# Altium PCB bottom_simp1.PcbDoc
Units mil, origin at the board's own origin, x right, y up, seen from the top; angles counter-clockwise.
Board outline 6000 x 4000 mil, 2 copper layers (Top Layer, Bottom Layer); 63 components, 63 nets, 241 pads, 16 vias.
Unrouted connection lines stored in the file: 163.
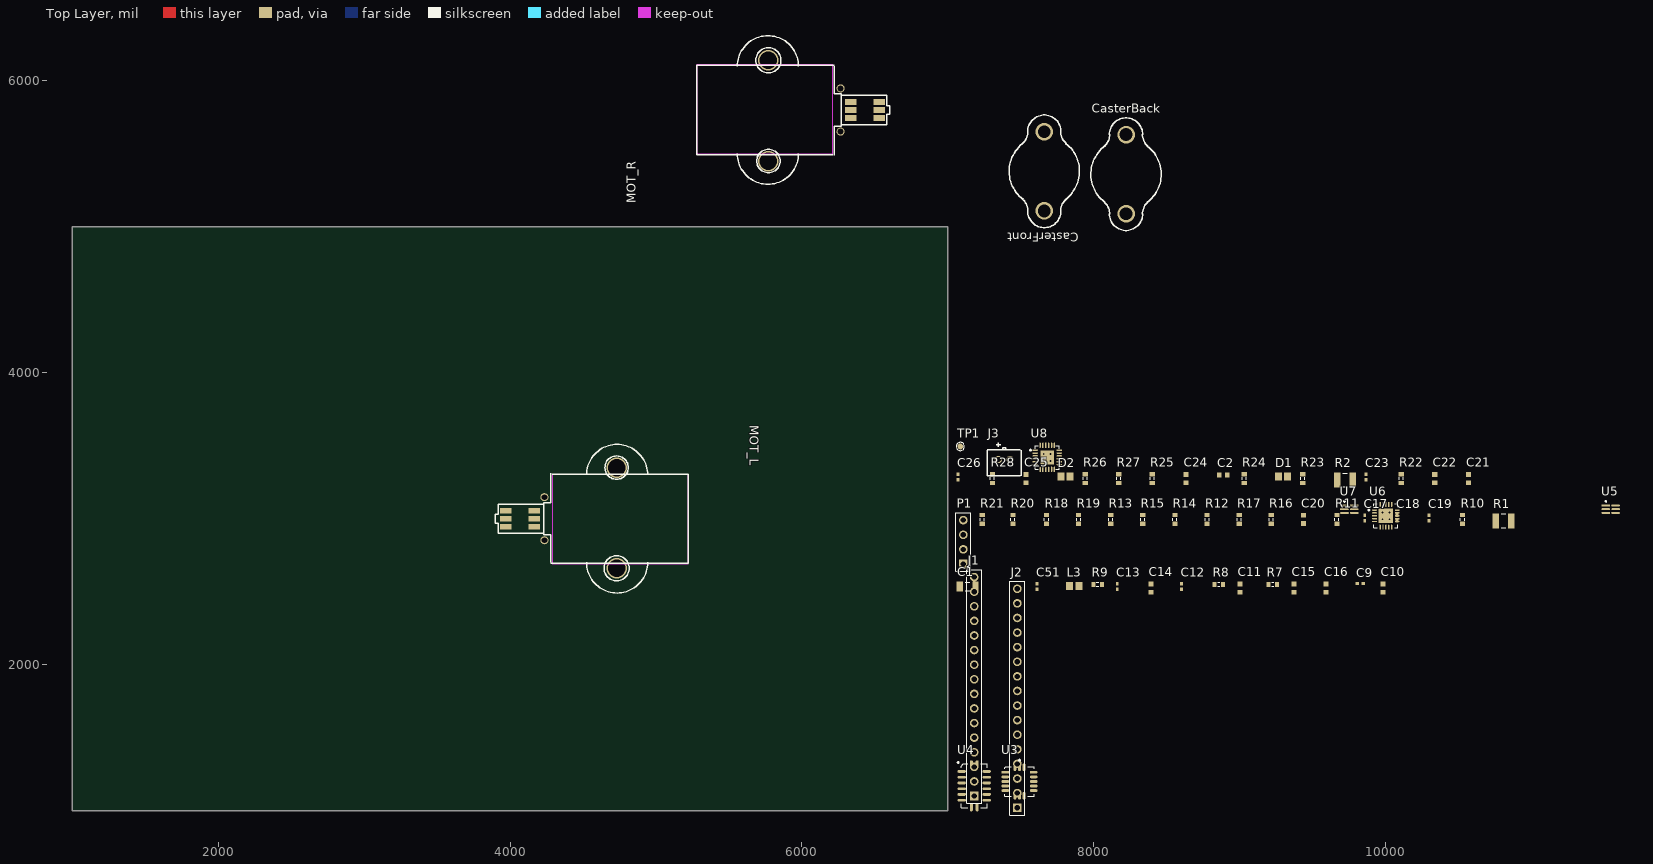
[diagram p0: Top Layer view]
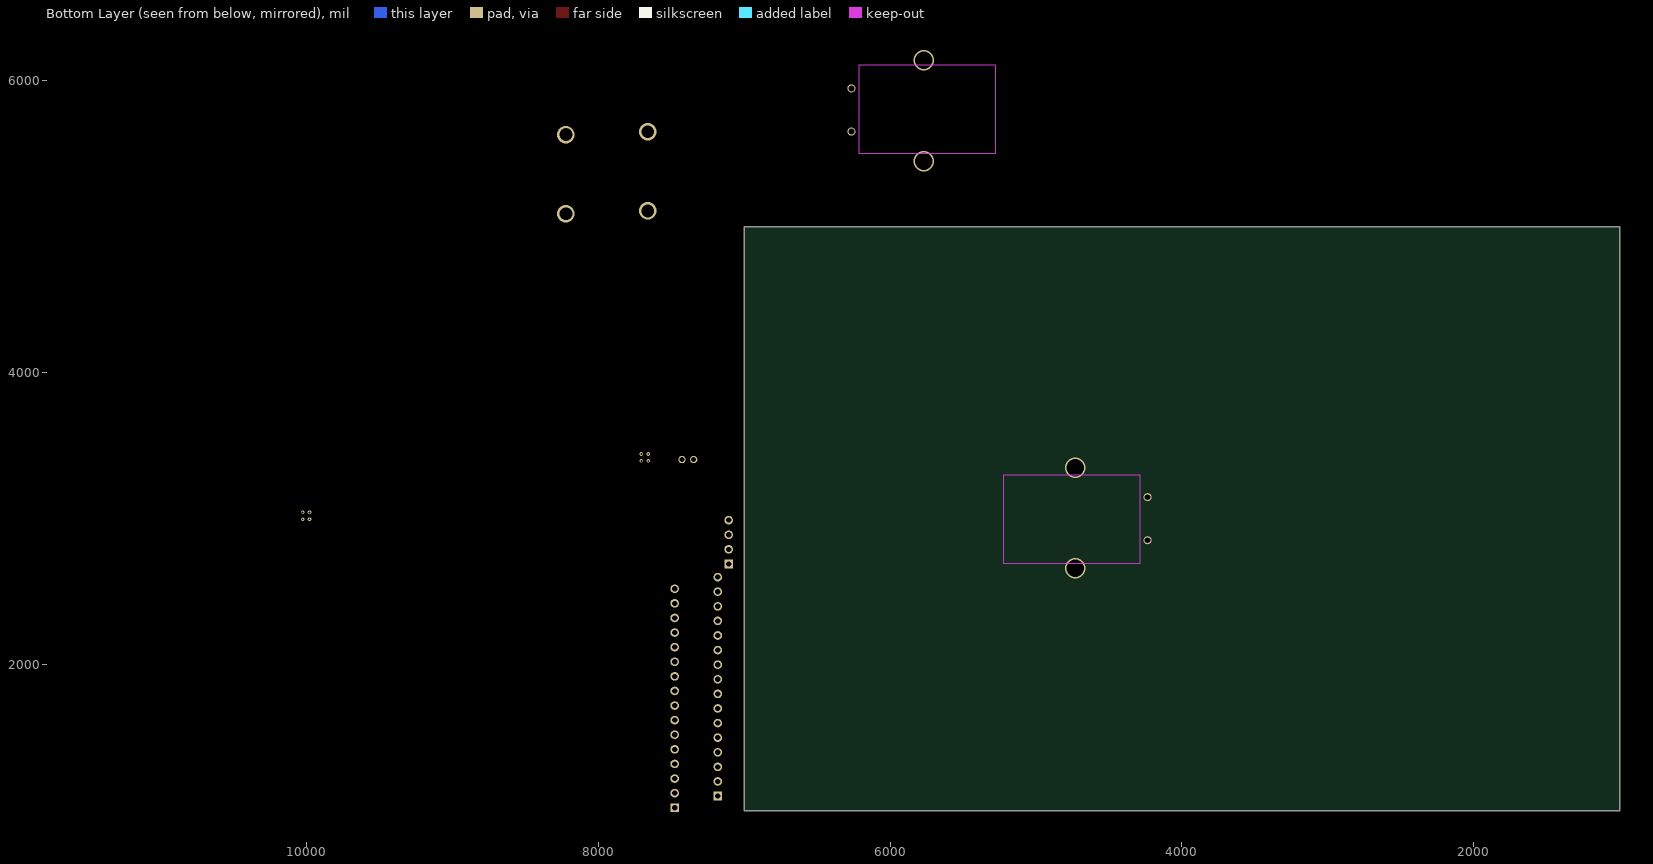
[diagram p1: Bottom Layer view, seen from below]

## Layer stack, top to bottom
Top Layer: signal copper 1.4
Dielectric: dielectric 12.6, FR-4, Dk 4.8
Bottom Layer: signal copper 1.4

## Board outline
1000,1000 7000,1000 7000,5000 1000,5000

## Design rules (kind name [scope] priority, off if disabled: settings)
Clearance [All] p1: gap=10
PolygonConnect [All] p1: connectstyle=Relief reliefconductorwidth=10 reliefentries=4 polygonreliefangle="90 Angle"
RoomDefinition bottom_simp_power [InComponentClass('bottom_simp_power')] p1: confinementstyle=ConfineIn formatcopy=TRUE lockcomponents=FALSE outline 7045,3280 7795,3280 7795,3635 7045,3635
RoomDefinition bottom_simp_motor [InComponentClass('bottom_simp_motor')] p2: confinementstyle=ConfineIn formatcopy=TRUE lockcomponents=FALSE outline 7045,1405 11620,1405 11620,3235 7045,3235
RoomDefinition bottom_simp_gyro [InComponentClass('bottom_simp_gyro')] p3: confinementstyle=ConfineIn formatcopy=TRUE lockcomponents=FALSE outline 7045,975 7635,975 7635,1465 7045,1465
RoutingVias [All] p1: holewidth=28 width=50 viastyle="Through Hole" minholewidth=28 minwidth=50 maxholewidth=28 maxwidth=50
SilkscreenOverComponentPads [All] p1: minsilkscreentomaskgap=10
SolderMaskExpansion [All] p1: expansion=4
Width "Schematic Width Constraint_14" [InNet('3.3V')] p1: maxlimit=100 minlimit=10 preferedwidth=25 minimp=50.000000 maximp=50.000000 favimp=50.000000
Width "Schematic Width Constraint_13" [InNet('VBAT_SW')] p2: maxlimit=50 minlimit=10 preferedwidth=25 minimp=50.000000 maximp=50.000000 favimp=50.000000
Width "Schematic Width Constraint_12" [InNet('VBAT +300')] p3: maxlimit=25 minlimit=10 preferedwidth=25 minimp=50.000000 maximp=50.000000 favimp=50.000000
Width "Schematic Width Constraint_11" [InNet('NetJ3_1')] p4: maxlimit=25 minlimit=10 preferedwidth=25 minimp=50.000000 maximp=50.000000 favimp=50.000000
Width "Schematic Width Constraint_10" [InNet('NetL2_1')] p5: maxlimit=25 minlimit=10 preferedwidth=25 minimp=50.000000 maximp=50.000000 favimp=50.000000
Width "Schematic Width Constraint_9" [InNet('NetL2_2')] p6: maxlimit=25 minlimit=10 preferedwidth=25 minimp=50.000000 maximp=50.000000 favimp=50.000000
Width "Schematic Width Constraint_8" [InNet('GND')] p7: maxlimit=25 minlimit=10 preferedwidth=25 minimp=50.000000 maximp=50.000000 favimp=50.000000
Width "Schematic Width Constraint_7" [InNet('VBAT')] p8: maxlimit=25 minlimit=10 preferedwidth=25 minimp=50.000000 maximp=50.000000 favimp=50.000000
Width "Schematic Width Constraint_6" [InNet('5VUSB_SW')] p9: maxlimit=25 minlimit=10 preferedwidth=25 minimp=50.000000 maximp=50.000000 favimp=50.000000
Width "Schematic Width Constraint_5" [InNet('VBAT_MOT_SW')] p10: maxlimit=25 minlimit=10 preferedwidth=20 minimp=50.000000 maximp=50.000000 favimp=50.000000
Width "Schematic Width Constraint_4" [InNet('MOT_0B')] p11: maxlimit=25 minlimit=10 preferedwidth=20 minimp=50.000000 maximp=50.000000 favimp=50.000000
Width "Schematic Width Constraint_3" [InNet('MOT_0A')] p12: maxlimit=25 minlimit=10 preferedwidth=20 minimp=50.000000 maximp=50.000000 favimp=50.000000
Width "Schematic Width Constraint_2" [InNet('MOT1_B')] p13: maxlimit=25 minlimit=10 preferedwidth=20 minimp=50.000000 maximp=50.000000 favimp=50.000000
Width "Schematic Width Constraint_1" [InNet('MOT1_A')] p14: maxlimit=25 minlimit=10 preferedwidth=20 minimp=50.000000 maximp=50.000000 favimp=50.000000
Width "Schematic Width Constraint" [InNet('9V_OUT')] p15: maxlimit=25 minlimit=10 preferedwidth=20 minimp=50.000000 maximp=50.000000 favimp=50.000000
Width [All] p16: maxlimit=10 minlimit=10 preferedwidth=10
27 further rules are at their usual default settings.

## Classes and differential pairs
component class bottom_simp_gyro: C1 C9 C10 C11 C12 C13 C14 C15 C16 C51 J1 J2 L3 R7 R8 R9 U3 U4
component class bottom_simp_motor: C17 C18 C19 C20 CasterBack CasterFront MOT_L MOT_R P1 R1 R10 R11 R12 R13 R14 R15 R16 R17 R18 R19 R20 R21 U5 U6 U7
component class bottom_simp_power: C2 C21 C22 C23 C24 C25 C26 D1 D2 J3 L1 L2 R2 R22 R23 R24 R25 R26 R27 R28 TP1 U8

## Components (designator, comment, footprint, x,y, rotation, side; value= is the part's Value field where it differs from the comment)
C1 "Cap Semi" CAPC3216L 7135,2535 r0 top
C2 "Cap" CAPC1608L 8885,3300 r0 top
C9 "Cap Semi" CAPC1005L 9825,2555 r0 top
C10 "Cap Semi" CAPC1608L 9980,2525 r90 top
C11 "Cap Semi" CAPC1608L 9000,2525 r90 top
C12 "Cap Semi" CAPC1005L 8600,2535 r90 top
C13 "Cap Semi" CAPC1005L 8160,2535 r90 top
C14 "Cap Semi" CAPC1608L 8390,2525 r90 top
C15 "Cap Semi" CAPC1608L 9370,2525 r90 top
C16 "Cap Semi" CAPC1608L 9590,2525 r90 top
C17 "Cap Semi" CAPC1005L 9855,3005 r90 top
C18 "Cap Semi" CAPC1005L 10075,3005 r90 top
C19 "Cap Semi" CAPC1005L 10295,3005 r90 top
C20 "Cap Semi" CAPC1608L 9435,2995 r90 top
C21 "Cap" CAPC1608L 10565,3275 r90 top
C22 "Cap" CAPC1608L 10335,3275 r90 top
C23 "Cap" CAPC1005L 9865,3285 r90 top
C24 "Cap" CAPC1608L 8630,3275 r90 top
C25 "Cap" CAPC1608L 7535,3275 r90 top
C26 "Cap" CAPC1005L 7070,3285 r90 top
C51 "Cap Semi" CAPC1005L 7610,2535 r90 top
CasterBack "non connect" "3/8\"Caster" 8220,5360 r90 top
CasterFront "non connect" "3/8\"Caster" 7660,5380 r270 top
D1 "Charge" INDC2012L 9295,3290 r0 top
D2 "Power" INDC2012L 7805,3290 r0 top
J1 "Header 16" HDR1X16 7180,1100 r90 top
J2 "Header 16" HDR1X16 7475,1020 r90 top
J3 "Bat" BatteryConnJST 7385,3405 r0 top
L3 "Inductor" INDC2012L 7865,2540 r0 top
MOT_L "motorEncoder" motorEncoder 3960,3000 r0 top
MOT_R "motorEncoder" motorEncoder 6540,5800 r180 top
P1 "Header 4" HDR1X4 7105,2690 r90 top
R1 "Res3" RESC3225L 10805,2985 r0 top
R2 "Res3" RESC3225L 9720,3265 r0 top
R7 "Res3" RESC1608L 9225,2550 r0 top
R8 "Res3" RESC1608L 8855,2550 r0 top
R9 "Res3" RESC1608L 8025,2550 r0 top
R10 "" RESC1608L 10525,2995 r90 top
R11 "" RESC1608L 9665,2995 r90 top
R12 "Res3" RESC1608L 8775,2995 r90 top
R13 "Res3" RESC1608L 8115,2995 r90 top
R14 "Res3" RESC1608L 8555,2995 r90 top
R15 "Res3" RESC1608L 8335,2995 r90 top
R16 "" RESC1608L 9215,2995 r90 top
R17 "" RESC1608L 8995,2995 r90 top
R18 "Res3" RESC1608L 7675,2995 r90 top
R19 "Res3" RESC1608L 7895,2995 r90 top
R20 "" RESC1608L 7445,2995 r90 top
R21 "" RESC1608L 7235,2995 r90 top
R22 "Res3" RESC1608L 10105,3275 r90 top
R23 "Res3" RESC1608L 9430,3275 r90 top
R24 "Res3" RESC1608L 9030,3275 r90 top
R25 "Res3" RESC1608L 8400,3275 r90 top
R26 "Res3" RESC1608L 7940,3275 r90 top
R27 "Res3" RESC1608L 8170,3275 r90 top
R28 "Res3" RESC1608L 7305,3275 r90 top
TP1 "TestPoint" TestPoint 7085,3495 r0 top
U3 "LPY510AL" LGA16 7490,1200 r0 top
U4 "LIS3LV02DL" "LGA16 (4.4x7.5x1 mm)" 7180,1170 r90 top
U5 "schmit trigger" DCK(R-PDSO-C6) 11540,3065 r0 top
U6 "MOTOR-A3906" QFN-20 10000,3020 r0 top
U7 "schmit trigger" DCK(R-PDSO-C6) 9750,3065 r0 top
U8 "LTC3566" QFN-24 7680,3420 r0 top

## Footprints (in the part's own frame and the unit in brackets; to place one, negate y for a bottom-side part, rotate by r counter-clockwise, add the part's x,y. Pads: shape width x height; smd on the part's side, far side on the other; paste and mask are expansions set on the pad)
"3/8\"Caster" [mil] "3/8\" caster for board"
  silkscreen extent -386,-241 386,241
BatteryConnJST [mil] "Connector for Battery"
  round 50 hole 35: 1(-40,0) 2(40,0)
  silkscreen extent -117,-110 116,115
CAPC1005L [mm] "Chip Capacitor, Body 1.0x0.5mm, IPC High Density"
  rect 0.6x0.5 smd: 1(-0.5,0) 2(0.5,0)
  body extent -0.55,-0.3 0.55,0.3, height 1.3
CAPC1608L [mm] "Chip Capacitor, Body 1.6x0.8mm, IPC High Density"
  rect 0.8x0.9 smd: 1(-0.7,0) 2(0.7,0)
  body extent -0.87,-0.48 0.87,0.48, height 1.3
CAPC3216L [mm] "Chip Capacitor, Body 3.2x1.6mm, IPC High Density"
  rect 1.1x1.7 smd: 1(-1.35,0) 2(1.35,0)
  silkscreen extent -0.4,-0.75 0.4,0.75, body extent -1.7,-0.9 1.7,0.9, height 1.3
DCK(R-PDSO-C6) [mm] "TSOP, 6-Leads, Body 2.2x1.4mm (max), Pitch 0.65mm, IPC Medium Density"
  oval 1.5x0.35 smd: 1(-0.85,0.65) 2(-0.85,0) 3(-0.85,-0.65) 4(0.85,-0.65) 5(0.85,0) 6(0.85,0.65)
  silkscreen extent -0.97,1.25 -0.72,1.5, body extent -0.7,-1.07 0.7,1.08, height 1.1
HDR1X4 [mm] "Connector; Header; 4 Position"
  rect 1.5x1.5 hole 0.9: 1(0,0)
  round 1.5 hole 0.9: 2(2.54,0) 3(5.08,0) 4(7.62,0)
  silkscreen extent -1.27,-1.27 8.89,1.27
HDR1X16 [mm] "Connector; Header; 16 Position"
  rect 1.5x1.5 hole 0.9: 1(0,0)
  round 1.5 hole 0.9: 2(2.54,0) 3(5.08,0) 4(7.62,0) 5(10.16,0) 6(12.7,0) 7(15.24,0) 8(17.78,0) 9(20.32,0) 10(22.86,0) 11(25.4,0) 12(27.94,0) 13(30.48,0) 14(33.02,0) 15(35.56,0) 16(38.1,0)
  silkscreen extent -1.27,-1.27 39.37,1.27
INDC2012L [mm] "Chip Inductor, Body 2.0x1.2mm, IPC High Density"
  rect 1.2x1.4 smd: 1(-0.8,0) 2(0.8,0)
  body extent -1.1,-0.7 1.1,0.7, height 0.55
LGA16 [mm] "LCC, 16-Pins, Body 5.2x5.2mm (max), Pitch 0.80mm, IPC Medium Density"
  oval 1.35x0.5 smd: 1(-2.475,1.6) 2(-2.475,0.8) 3(-2.475,0) 4(-2.475,-0.8) 5(-2.475,-1.6) 9(2.475,-1.6) 10(2.475,-0.8) 11(2.475,0) 12(2.475,0.8) 13(2.475,1.6)
  oval 0.5x1.35 smd: 6(-0.8,-2.475) 7(0,-2.475) 8(0.8,-2.475) 14(0.8,2.475) 15(0,2.475) 16(-0.8,2.475)
  silkscreen extent -2.6,-2.6 2.6,3.82, body extent -2.5,-2.5 2.5,2.5, height 1.6
"LGA16 (4.4x7.5x1 mm)" [mm] "LCC, 16-Pins, Body 7.7x4.6mm (max), Pitch 1.00mm, IPC Medium Density"
  oval 0.5x1.45 smd: 1(2.5,2.175) 2(1.5,2.175) 3(0.5,2.175) 4(-0.5,2.175) 5(-1.5,2.175) 6(-2.5,2.175) 9(-2.5,-2.175) 10(-1.5,-2.175) 11(-0.5,-2.175) 12(0.5,-2.175) 13(1.5,-2.175) 14(2.5,-2.175)
  oval 1.45x0.5 smd: 7(-3.725,0.5) 8(-3.725,-0.5) 15(3.725,-0.5) 16(3.725,0.5)
  silkscreen extent -3.85,-2.3 4.19,2.92, body extent -3.75,-2.2 3.75,2.2, height 1
motorEncoder [mm] "Precision Wire Wound Inductor, 2-Leads, Body 2.5x2.3mm, IPC Medium Density"
  rect 2x1 smd: A(0.25,1.4) C(5.25,1.4) E1(5.25,0) E2(5.25,-1.4) K(0.25,-1.4) NC(0.25,0)
  round 1.4 hole 1: M1(7,3.75) M2(7,-3.75)
  Keep-Out Layer region: 8.382,-7.874 32.004,-7.874 32.004,7.62 8.382,7.62
  silkscreen extent -1.52,-12.93 32,12.93
QFN-20 [mm] "QFN, 20-Leads, Body 4.2x4.2mm (max), Pitch 0.50mm, IPC Medium Density"
  oval 0.85x0.25 smd: 1(-1.975,1) 2(-1.975,0.5) 3(-1.975,0) 4(-1.975,-0.5) 5(-1.975,-1) 11(1.975,-1) 12(1.975,-0.5) 13(1.975,0) 14(1.975,0.5) 15(1.975,1)
  oval 0.25x0.85 smd: 6(-1,-1.975) 7(-0.5,-1.975) 8(0,-1.975) 9(0.5,-1.975) 10(1,-1.975) 16(1,1.975) 17(0.5,1.975) 18(0,1.975) 19(-0.5,1.975) 20(-1,1.975)
  rect 2.5x2.5 smd: 21(0,0)
  silkscreen extent -3.07,-2.1 2.1,2.1, body extent -2.07,-2.07 2.07,2.07, height 0.8
QFN-24 [mm] "QFN, 24-Leads, Body 4.1x4.1mm (max), Pitch 0.50mm, IPC Medium Density"
  oval 0.95x0.25 smd: 1(-2.1,1.25) 2(-2.1,0.75) 3(-2.1,0.25) 4(-2.1,-0.25) 5(-2.1,-0.75) 6(-2.1,-1.25) 13(2.1,-1.25) 14(2.1,-0.75) 15(2.1,-0.25) 16(2.1,0.25) 17(2.1,0.75) 18(2.1,1.25)
  oval 0.25x0.95 smd: 7(-1.25,-2.1) 8(-0.75,-2.1) 9(-0.25,-2.1) 10(0.25,-2.1) 11(0.75,-2.1) 12(1.25,-2.1) 19(1.25,2.1) 20(0.75,2.1) 21(0.25,2.1) 22(-0.25,2.1) 23(-0.75,2.1) 24(-1.25,2.1)
  rect 2.4x2.4 smd: 25(0,0)
  silkscreen extent -3.02,-2.05 2.05,2.05, body extent -2.05,-2.05 2.05,2.05, height 0.8
RESC1608L [mm] "Chip Resistor, Body 1.6x0.8mm, IPC High Density"
  rect 0.7x0.9 smd: 1(-0.75,0) 2(0.75,0)
  silkscreen extent -0.2,-0.35 0.2,0.35, body extent -0.85,-0.48 0.85,0.48, height 0.9
RESC3225L [mm] "Chip Resistor, Body 3.2x2.5mm, IPC High Density"
  rect 1.1x2.6 smd: 1(-1.35,0) 2(1.35,0)
  silkscreen extent -0.4,-1.2 0.4,1.2, body extent -1.68,-1.32 1.68,1.32, height 0.9
TestPoint [mil]
  round 40 smd: 1(0,0)
  silkscreen extent -28,-28 28,28

## Part data
C1 C9 C10 C11 C12 C13 C14 C15 C16 C17 C18 C19 C20 C51: "Capacitor (Semiconductor SIM Model)"
C2 C21 C22 C23 C24 C25 C26: "Capacitor"
CasterBack CasterFront: library part Caster, "This is just a space saver to get the caster onto the pcb"
D1 D2: library part LED2, "Typical RED, GREEN, YELLOW, AMBER GaAs LED"
J1 J2: "Header, 16-Pin"
J3: library part BatteryConnJST
P1: "Header, 4-Pin"
R1 R2 R7 R8 R9 R12 R13 R14 R15 R18 R19 R22 R23 R24 R25 R26 R27 R28: "Resistor"
R10 R11 R16 R17 R20 R21: library part Res3, "Resistor"

## Via types
v1: diameter 25.98, hole 12.99, Top Layer to Bottom Layer, tented top, 8 vias
v2: diameter 120, hole 86.61, Top Layer to Bottom Layer, 4 vias
v3: diameter 140, hole 120, Top Layer to Bottom Layer, 4 vias

## Nets (pads, with @x,y where several pads share a name; then routed paths per layer and width w, separated by ;. In a path a pad name is that pad's centre, name@x,y a point inside that pad or via, vN(x,y) a via of type N, cw(c..) or ccw(c..) an arc to the next point about the centre after c; other vN are vias at no path point)
3.3V: C1.2 C25.2 D1.1 J2.16 L3.2 MOT_L.C MOT_R.C R11.2 R20.2 R26.1 R27.2 U8.10 U8.13 U8.14
3.3VLDO: C2.1 U8.1 U8.24
5VUSB_SW: C22.2 J2.15 U8.21
9V_OUT: P1.1
CHRG: R24.1 U8.16
CHRGEN: J2.12 P1.4 R25.2 TP1.1 U6.3 U8.23
GND: C1.1 C2.2 C9.1 C10.1 C11.1 C14.1 C15.1 C16.1 C20.1 C21.1 C22.1 C23.1 C24.2 C25.1 C51.1 D2.2 J1.7 J2.3 J3.2 MOT_L.K MOT_R.K P1.2 R10.2 R12.2 R13.2 R14.2 R15.2 R16.1 R17.1 R18.2 R19.2 R21.1 R22.1 R23.2 R25.1 R28.2 U3.1 U3.11 U3.12 U3.13 U4.8 U4.9 U4.14 U4.15 U4.16 U5.2 U6.2 U6.21 U7.2 U8.3 U8.6 U8.8 U8.12 U8.17 U8.25
  other v1: 9976.38,2996.38 10023.62,2996.38 9976.38,3043.62 10023.62,3043.62 7656.38,3396.38 7703.62,3396.38 7656.38,3443.62 7703.62,3443.62
GYRO_VREF: J1.8 U3.7
GYROA_X_1: C11.2 R7.1 U3.5
GYROA_X_4: J1.11 U3.6
GYROA_Z_1: C14.2 R8.1 U3.9
GYROA_Z_4: J1.10 U3.8
MOT0_CUR: J2.1 R19.1 U6.15
MOT0_PWMA: J2.4 R15.1 U6.4
MOT0_PWMB: J2.5 R14.1 U6.5
MOT1_A: MOT_R.M2 U6.10
MOT1_B: MOT_R.M1 U6.12
MOT1_CUR: J2.2 R18.1 U6.11
MOT1_PWMA: J2.6 R13.1 U6.6
MOT1_PWMB: J2.7 R12.1 U6.7
MOT_0A: MOT_L.M2 U6.16
MOT_0B: MOT_L.M1 U6.14
NetC12_1: C12.1 R9.2
NetC12_2: C12.2 C13.2 U3.2
NetC13_1: C13.1 R9.1 U3.3
NetC17_1: C17.1 U6.19
NetC17_2: C17.2 U6.1
NetC18_1: C18.1 U6.18
NetC18_2: C18.2 U6.20
NetC19_2: C19.2 U6.17
NetC23_2: C23.2 R22.2 U8.2
NetC26_1: C26.1 R26.2 R28.1 U8.4
NetC26_2: C26.2 U8.5
NetD1_2: D1.2 R24.2
NetD2_1: D2.1 R27.1
NetJ3_1: J3.1 R2.2
NetL1_1: U8.22
NetL2_1: U8.7
NetL2_2: U8.11
NetMOT_L_A: MOT_L.A R11.1
NetMOT_R_A: MOT_R.A R20.1
NetR7_2: R7.2 U3.4
NetR8_2: R8.2 U3.10
NetR23_1: R23.1 U8.15
QEI_0A: J2.8 U5.6
QEI_0A_ANALOG: MOT_L.E1 R16.2 U5.1
QEI_0B: J2.9 U5.4
QEI_0B_ANALOG: MOT_L.E2 R10.1 U5.3
QEI_1A: J2.10 U7.6
QEI_1A_ANALOG: MOT_R.E1 R21.2 U7.1
QEI_1B: J2.11 U7.4
QEI_1B_ANALOG: MOT_R.E2 R17.2 U7.3
SPI_MISO: J1.1 U4.2
SPI_MOSI: J1.2 U4.3
SPI_SCK: J1.3 U4.5
SPI_SS_ACCEL: J1.4 U4.6
SPI_SS_AUDIO: J1.5
SPI_SS_LED: J1.6
VBAT: J2.14 R2.1
"VBAT +300": C21.2 C24.1 U8.9 U8.20
VBAT_MOT_SW: C19.1 C20.2 R1.2 U6.13
VBAT_SW: J2.13 P1.3 R1.1 U8.19
VDDA: C9.2 C10.2 C15.2 C16.2 C51.2 L3.1 U3.14 U3.15 U3.16 U4.4 U4.10 U4.11 U4.12 U4.13
pads on no net: J1.9 J1.12 J1.13 J1.14 J1.15 J1.16 MOT_L.NC MOT_R.NC U4.1 U4.7 U5.5 U6.8 U6.9 U7.5 U8.18
copper on no net:
  other v2: 8220,5088.35 7660,5108.35 8220,5631.65 7660,5651.65
  other v3: 4730,2660 4730,3350 5770,5450 5770,6140

## Silkscreen, mask and mechanical layers (free items; w line width, h text height)
Mechanical 1:
  drawing of 606 lines, arcs and shapes, not listed